# Altium PCB BabyPukeko.PcbDoc
Units mm, origin at the board's own origin, x right, y up, seen from the top; angles counter-clockwise.
Board outline 10 x 12.75 mm, 6 copper layers (Top Layer, GND, SIG, VCC, GND_2, Bottom Layer), stack 1.538 mm thick; 26 components, 27 nets, 165 pads, 56 vias.
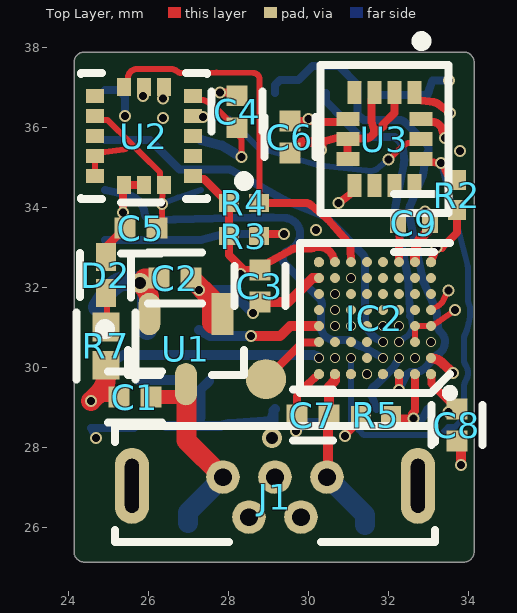
[diagram p0: Top Layer view]
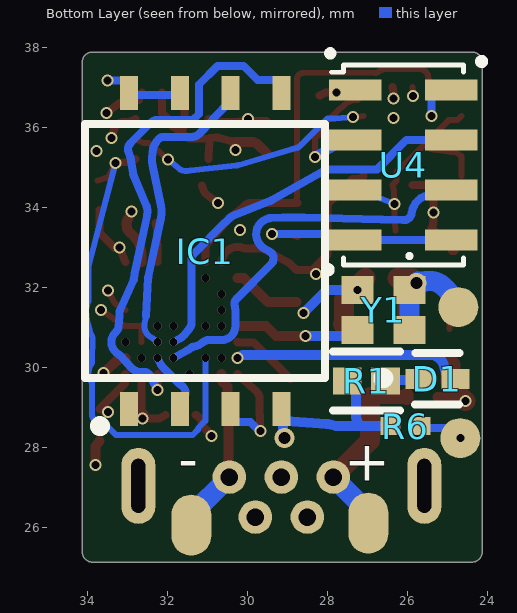
[diagram p1: Bottom Layer view, seen from below]
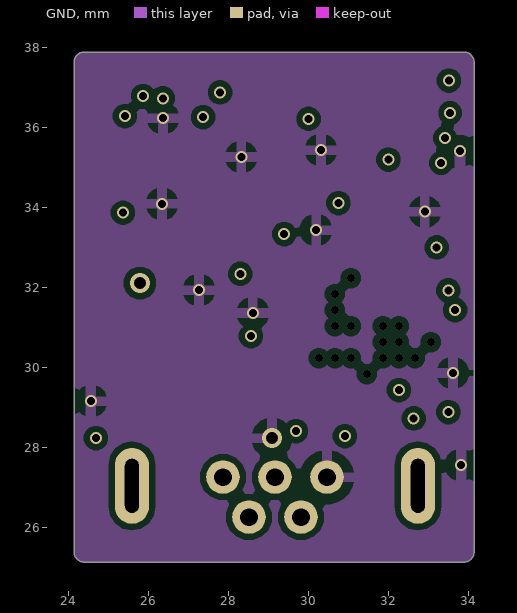
[diagram p2: GND]
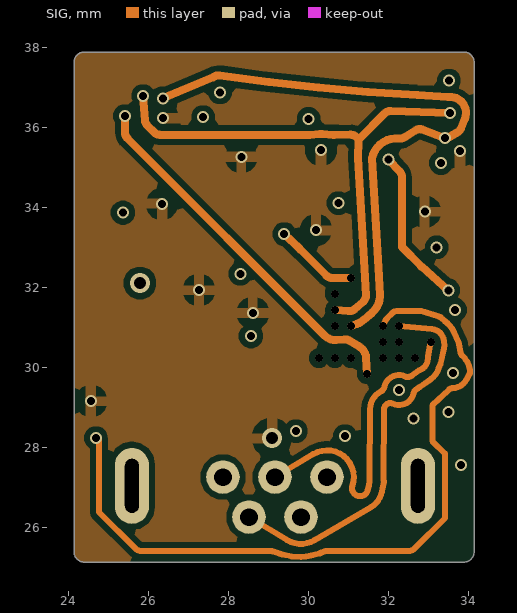
[diagram p3: SIG]
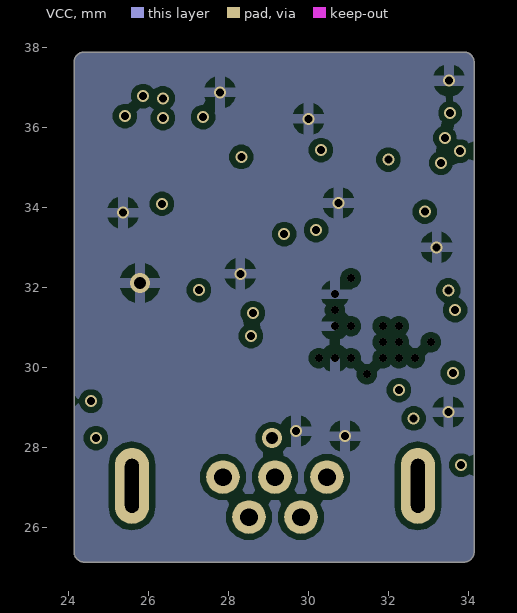
[diagram p4: VCC]
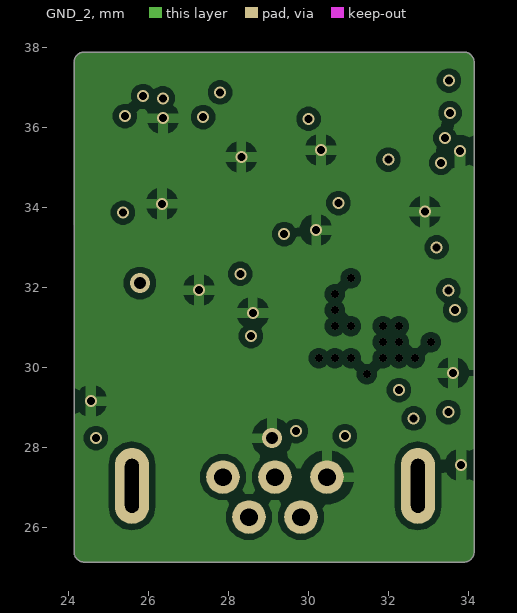
[diagram p5: GND_2]
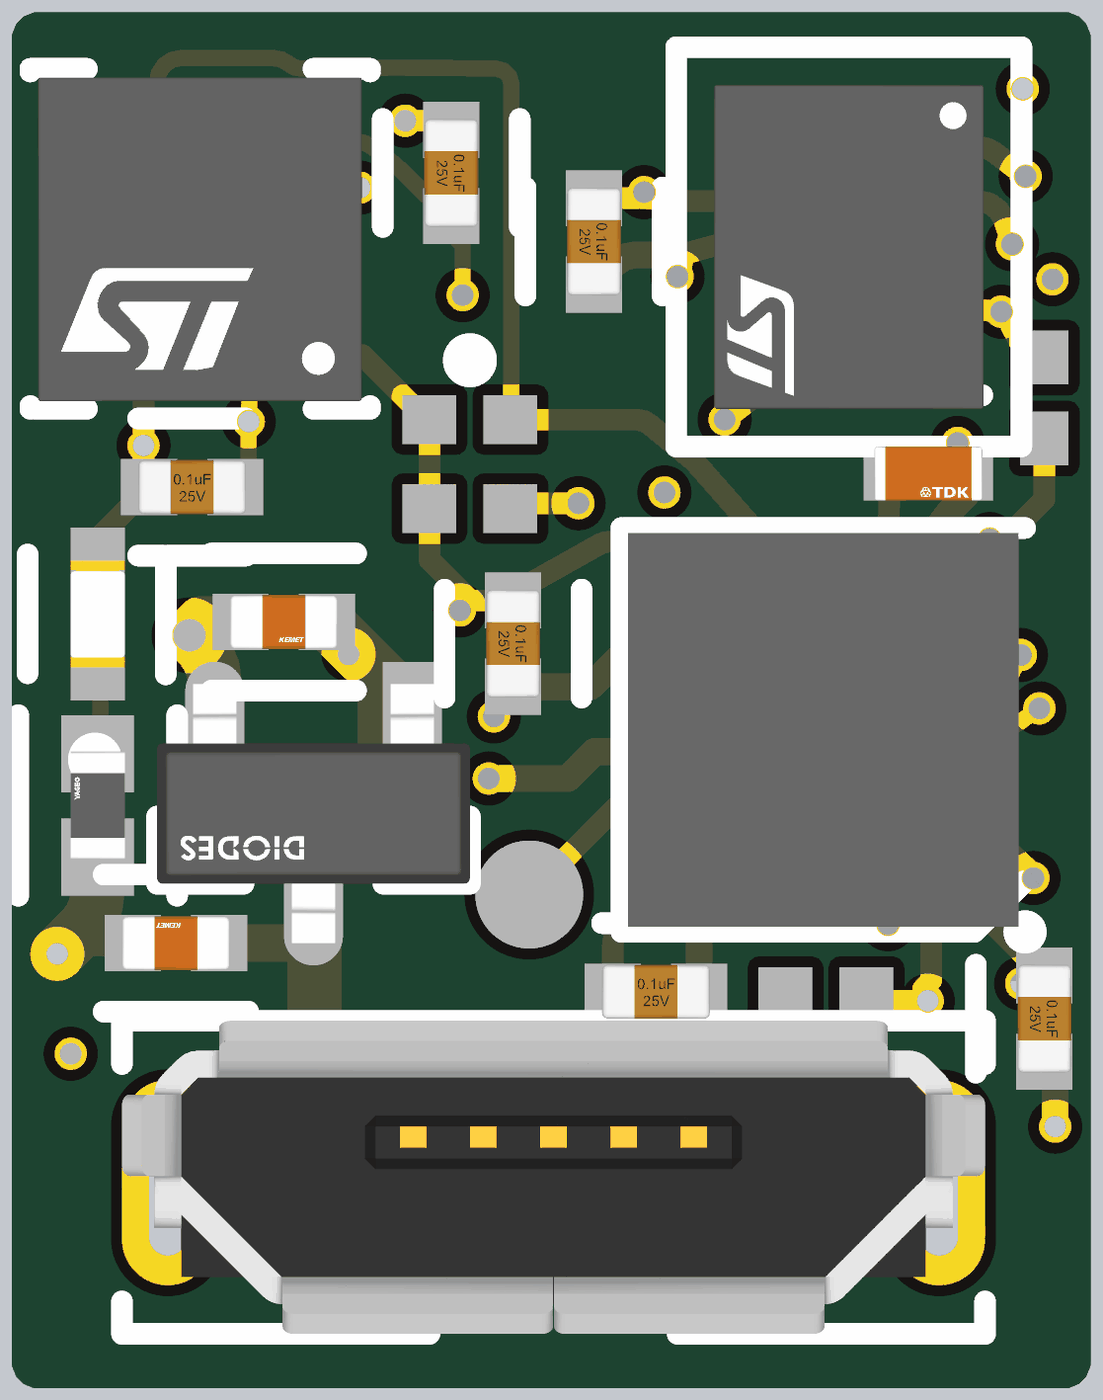
[diagram p6: 3D render of the assembled board from above, using the file's embedded part models]
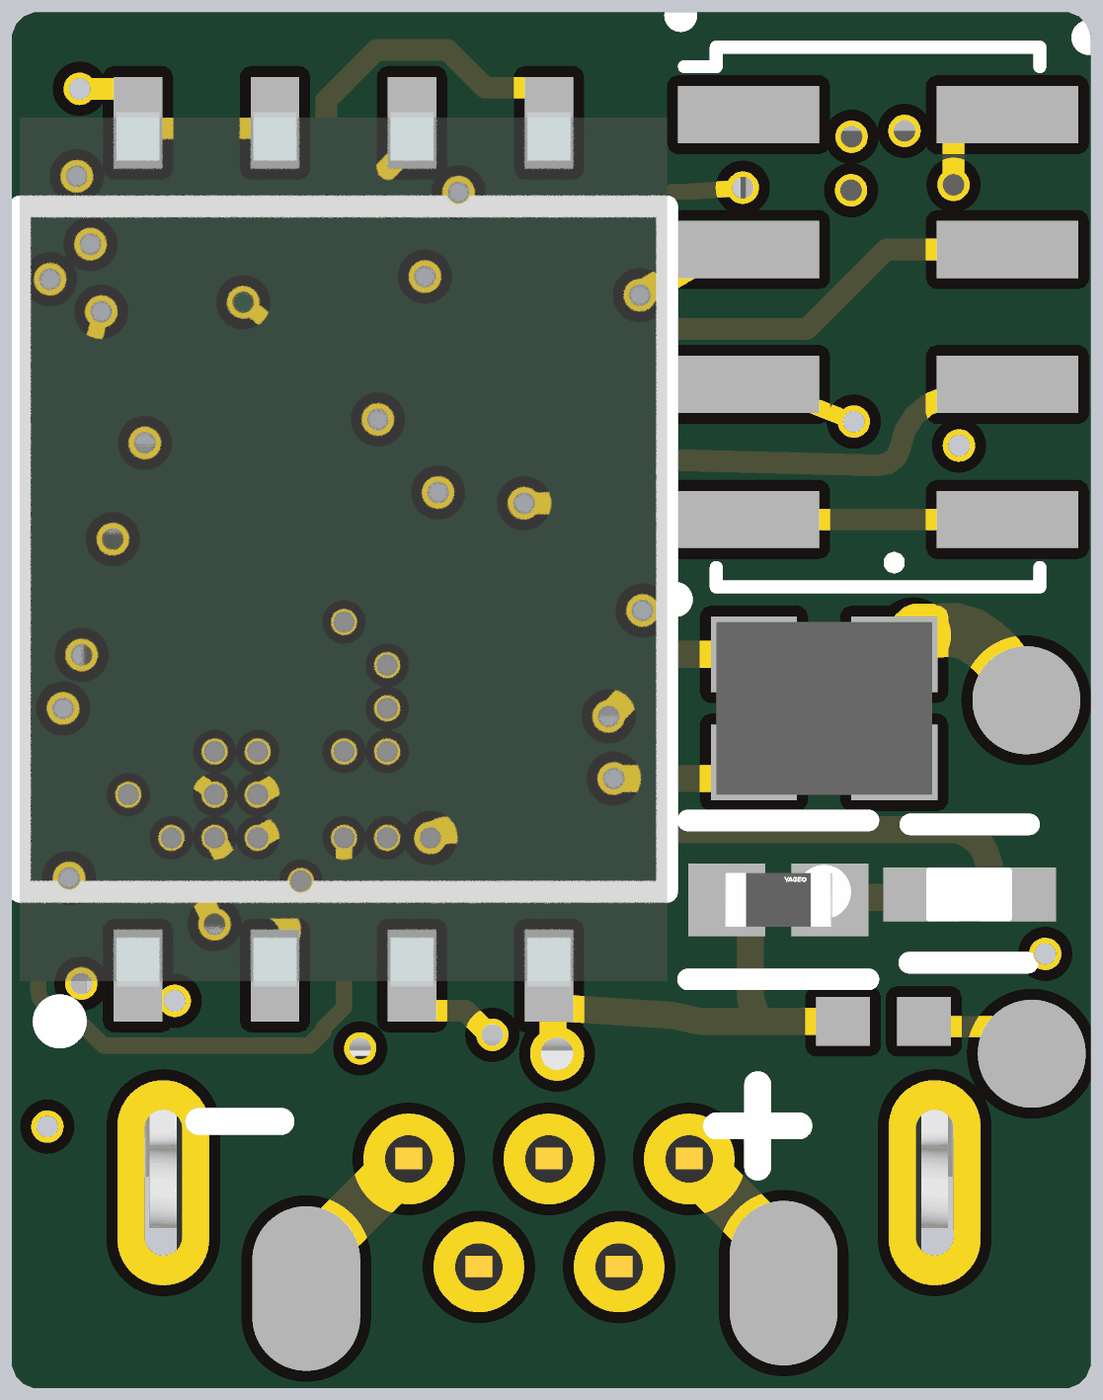
[diagram p7: 3D render of the assembled board from below, using the file's embedded part models]

## Layer stack, top to bottom
Top Solder: solder mask 0.0102, Solder Resist, Dk 3.5
Top Layer: signal copper 0.035
Dielectric 2: prepreg 0.0994, PP-006, Dk 4.1
GND: signal copper 0.0152
Dielectric 4: core 0.55, PP-006, Dk 4.6
SIG: signal copper 0.0152
Dielectric 1: dielectric 0.1088, FR-4, Dk 4.16
VCC: signal copper 0.0152
Dielectric 5: core 0.55, PP-006, Dk 4.6
GND_2: signal copper 0.0152
Dielectric 3: prepreg 0.0994, PP-006, Dk 4.1
Bottom Layer: signal copper 0.035
Bottom Solder: solder mask 0.0102, Solder Resist, Dk 3.5

## Board outline
24.129,25.379 24.129,37.621 cw(c24.383,37.621) 24.383,37.875 33.875,37.875 cw(c33.875,37.621) 34.129,37.621 34.129,25.379 cw(c33.875,25.379) 33.875,25.125 24.383,25.125 cw(c24.383,25.379)

## Design rules (kind name [scope] priority, off if disabled: settings)
Clearance [All] p1: gap=0.15 ignorepadtopadclearanceinfootprint=TRUE
DiffPairsRouting [All] p1: maxlimit=0.254 minlimit=0.15 mostfreqgap=0.254 toplayer_minwidth=0.2 toplayer_maxwidth=0.381 toplayer_prefwidth=0.2 midlayer1_minwidth=0.2 midlayer1_maxwidth=0.381 midlayer1_prefwidth=0.2 midlayer2_minwidth=0.2 midlayer2_maxwidth=0.381 midlayer2_prefwidth=0.2 midlayer3_minwidth=0.2 midlayer3_maxwidth=0.381 midlayer3_prefwidth=0.2 midlayer4_minwidth=0.2 midlayer4_maxwidth=0.381 midlayer4_prefwidth=0.2 bottomlayer_minwidth=0.2 bottomlayer_maxwidth=0.381 bottomlayer_prefwidth=0.2 maxuncoupledlength=12.7
PolygonConnect [All] p1: connectstyle=Relief reliefconductorwidth=0.254 reliefentries=4 polygonreliefangle="90 Angle" airgapwidth=0.254
RoutingVias [All] p1: holewidth=0.3 width=0.2 viastyle="Through Hole" minholewidth=0.2 minwidth=0.2 maxholewidth=0.5 maxwidth=0.7
SolderMaskExpansion [All] p1: expansion=0.102 istentingtop=FALSE
SupplyNets "Schematic Supply Nets_2" [InNet('5v0')] p1: voltage=0.000
SupplyNets "Schematic Supply Nets_1" [InNet('3v3')] p2: voltage=0.000
SupplyNets "Schematic Supply Nets" [InNet('GND')] p3: voltage=0.000
Width [All] p1: maxlimit=0.5 minlimit=0.15 preferedwidth=0.2 midlayer3_maxwidth=0.254 midlayer4_maxwidth=0.254 minimp=50.000000 maximp=50.000000 favimp=50.000000
29 further rules are at their usual default settings.

## Classes and differential pairs
differential pair USB: +USB_P -USB_N

## Components (designator, comment, footprint, x,y, rotation, side; value= is the part's Value field where it differs from the comment)
C1 "C0402C105K8PACTU" FP-C0402C105K8PACTU-MFG 25.65,29.25 r180 top
C2 "C0402C105K8PACTU" FP-C0402C105K8PACTU-MFG 26.65,32.225 r0 top
C3 "0.1uF" FP-C0402-BB-MFG 28.775,32.025 r270 top value="0.10 μF"
C4 "0.1uF" FP-C0402-BB-MFG 28.202,36.385 r270 top value="0.10 μF"
C5 "0.1uF" FP-C0402-BB-MFG 25.8,33.475 r0 top value="0.10 μF"
C6 "0.1uF" FP-C0402-BB-MFG 29.525,35.75 r270 top value="0.10 μF"
C7 "0.1uF" FP-C0402-BB-MFG 30.1,28.8 r0 top value="0.10 μF"
C8 "0.1uF" FP-C0402-BB-MFG 33.7,28.55 r270 top value="0.10 μF"
C9 "4.7uF" FP-C1005-050-0_15-MFG 32.625,33.6 r0 top
D1 "APHHS1005CGCK" FP-APHHS1005CGCK-MFG 25.25,29.7 r180 bottom
D2 "APHHS1005CGCK" FP-APHHS1005CGCK-MFG 24.925,32.3 r90 top
IC1 "MT29F1G01ABAFDWB-IT_F_TR" SON127P800X600X65-8N 31.055,32.9 r90 bottom locked
IC2 "STM32F412REY6TR" BGA64C40P8X8_362X365X58 31.65,31.225 r180 top
J1 "614105150721" 614105150721 29.15,27.03 r0 top locked
R1 "RC0402FR-071KL" FP-RC0402-0_4-IPC_A 27.025,29.65 r180 bottom
R2 "10K" RESC1005X40X25LL05T10 33.7,34.3 r90 top
R3 "10K" RESC1005X40X25LL05T10 28.375,33.275 r0 top
R4 "10K" RESC1005X40X25LL05T10 28.375,34.1 r0 top
R5 "10K" RESC1005X40X25LL05T10 31.675,28.8 r0 top
R6 "10K" RESC1005X40X25LL05T10 26.05,28.525 r180 bottom
R7 "RC0402FR-071KL" FP-RC0402-0_4-IPC_A 24.925,30.525 r90 top
U1 "AP2210N-3.3TRG1" FP-SOT23-IPC_C 26.925,30.45 r270 top
U2 "H3LIS331DLTR" FP-TFLGA16-7983231-MFG 25.875,35.775 r180 top locked
U3 "LSM6DSO32TR" FP-LGA-14L-DM00249496-MFG 31.888,35.7 r270 top
U4 "MS560702BA03-50" MS5607 26.1,35.05 r270 bottom
Y1 "ECS-TXO-2016-33-120-TR" ECSTXO201633120TR 26.6,31.425 r0 bottom

## Footprints (in the part's own frame and the unit in brackets; to place one, negate y for a bottom-side part, rotate by r counter-clockwise, add the part's x,y. Pads: shape width x height; smd on the part's side, far side on the other; paste and mask are expansions set on the pad)
614105150721 [mm] "Micro USB 2.0 Type B Vertical 5 Contacts"
  round 0.84 hole 0.44: 1(-1.3,0.22) 2(-0.65,-0.78) 3(0,0.22) 4(0.65,-0.78) 5(1.3,0.22)
  oval 0.85x1.9 hole 0.35 slot 1.35 at 90 deg: Shell(-3.575,0) Shell(3.575,0)
  silkscreen extent -4,-1.4 4,1.5, body extent -4,-1.4 4,1.5, height 5.64
BGA64C40P8X8_362X365X58 [mm]
  round 0.26 smd: A1(-1.4,1.4) A2(-1,1.4) A3(-0.6,1.4) A4(-0.2,1.4) A5(0.2,1.4) A6(0.6,1.4) A7(1,1.4) A8(1.4,1.4) H1(-1.4,-1.4) H8(1.4,-1.4)
  round 0.25 smd: B1(-1.4,1) B2(-1,1) B3(-0.6,1) B4(-0.2,1) B5(0.2,1) B6(0.6,1) B7(1,1) B8(1.4,1) C1(-1.4,0.6) C2(-1,0.6) C3(-0.6,0.6) C4(-0.2,0.6) C5(0.2,0.6) C6(0.6,0.6) C7(1,0.6) C8(1.4,0.6) D1(-1.4,0.2) D2(-1,0.2) D3(-0.6,0.2) D4(-0.2,0.2) D5(0.2,0.2) D6(0.6,0.2) D7(1,0.2) D8(1.4,0.2) E1(-1.4,-0.2) E2(-1,-0.2) E3(-0.6,-0.2) E4(-0.2,-0.2) E5(0.2,-0.2) E6(0.6,-0.2) E7(1,-0.2) E8(1.4,-0.2) F1(-1.4,-0.6) F2(-1,-0.6) F3(-0.6,-0.6) F4(-0.2,-0.6) F5(0.2,-0.6) F6(0.6,-0.6) F7(1,-0.6) F8(1.4,-0.6) G1(-1.4,-1) G2(-1,-1) G3(-0.6,-1) G4(-0.2,-1) G5(0.2,-1) G6(0.6,-1) G7(1,-1) G8(1.4,-1) H2(-1,-1.4) H3(-0.6,-1.4) H4(-0.2,-1.4) H5(0.2,-1.4) H6(0.6,-1.4) H7(1,-1.4)
  silkscreen extent -1.97,-1.87 1.87,1.97, body extent -1.81,-1.83 1.81,1.83, height 0.59
ECSTXO201633120TR [mm]
  rect 0.8x0.7 smd: 1(-0.65,-0.5) 2(0.65,-0.5) 3(0.65,0.5) 4(-0.65,0.5)
  silkscreen extent -0.7,-1.4 -0.6,-1.3, body extent -1,-0.8 1,0.8, height 0.9
FP-APHHS1005CGCK-MFG [mm]
  rect 0.7x0.5 smd paste+0 mask+0: 1(-0.45,0) 2(0.45,0)
  silkscreen extent -1.48,-0.63 0.55,0.65, body extent -0.5,-0.25 0.5,0.25, height 0.5
FP-C0402-BB-MFG [mm]
  rect 0.52x0.52 smd paste+0 mask+0: 1(-0.4,0) 2(0.4,0)
  silkscreen extent -0.5,-0.64 0.5,0.64, body extent -0.8,-0.4 0.8,0.4, height 0.25
FP-C0402C105K8PACTU-MFG [mm]
  rect 0.52x0.52 smd paste+0 mask+0: 1(-0.4,0) 2(0.4,0)
  silkscreen extent -0.67,-0.64 0.67,0.64, body extent -0.8,-0.4 0.8,0.4, height 0.25
FP-C1005-050-0_15-MFG [mm]
  rect 0.4x0.5 smd paste+0 mask+0: 1(-0.4,0) 2(0.4,0)
  silkscreen extent -0.5,-0.72 0.5,0.72, body extent -0.7,-0.43 0.7,0.43, height 0.25
FP-LGA-14L-DM00249496-MFG [mm]
  rect 0.575x0.35 smd paste-1000 mask+0: 1(-1.162,0.75) 2(-1.162,0.25) 3(-1.162,-0.25) 4(-1.162,-0.75) 8(1.162,-0.75) 9(1.162,-0.25) 10(1.162,0.25) 11(1.162,0.75)
  rect 0.35x0.575 smd paste-1000 mask+0: 5(-0.5,-0.913) 6(0,-0.913) 7(0.5,-0.913) 12(0.5,0.913) 13(0,0.913) 14(-0.5,0.913)
  silkscreen extent -2.57,-1.6 1.85,1.6, body extent -2.05,-1.8 2.05,1.8, height 0.25
FP-RC0402-0_4-IPC_A [mm]
  rect 0.715x0.672 smd paste+0 mask+0: 1(-0.479,0) 2(0.479,0)
  silkscreen extent -0.84,-0.74 0.84,0.74, body extent -0.5,-0.25 0.5,0.25, height 0.4
FP-SOT23-IPC_C [mm]
  rect 1.059x0.547 smd paste+0 mask+0: 1(-0.877,0.915)
  rrect100% 1.059x0.547 smd paste+0 mask+0: 2(-0.877,-0.915) 3(0.877,0)
  silkscreen extent 0.03,-1.45 0.65,1.45, body extent -1.51,-1.55 1.51,1.55, height 0.25
FP-TFLGA16-7983231-MFG [mm]
  rect 0.45x0.35 smd paste+0 mask+0: 1(-1.225,1) 2(-1.225,0.5) 3(-1.225,0) 4(-1.225,-0.5) 5(-1.225,-1) 9(1.225,-1) 10(1.225,-0.5) 11(1.225,0) 12(1.225,0.5) 13(1.225,1)
  rect 0.35x0.45 smd paste+0 mask+0: 6(-0.5,-1.225) 7(0,-1.225) 8(0.5,-1.225) 14(0.5,1.225) 15(0,1.225) 16(-0.5,1.225)
  silkscreen extent -2.63,-1.58 1.58,1.58, body extent -2.07,-2.07 2.07,2.07, height 0.25
MS5607 [mm] "Small Outline No-Lead (SON), 1.25 mm pitch; 8 pin, 5.00 mm L X 3.00 mm W X 0.95 mm H body"
  rect 0.53x1.31 smd: 1(-1.875,-1.2) 2(-0.625,-1.2) 3(0.625,-1.2) 4(1.875,-1.2) 5(1.875,1.2) 6(0.625,1.2) 7(-0.625,1.2) 8(-1.875,1.2)
  silkscreen extent -2.82,-1.92 2.65,1.99, body extent -2.54,-1.52 2.54,1.52, height 0.95
RESC1005X40X25LL05T10 [mm] "Chip Resistor, 2-Leads, Body 1.00x0.50mm, IPC High Density"
  rect 0.5x0.45 smd: 1(-0.375,0) 2(0.375,0)
  body extent -0.53,-0.27 0.53,0.28, height 0.4
SON127P800X600X65-8N [mm]
  rect 0.85x0.45 smd: 1(-3.95,1.905) 2(-3.95,0.635) 3(-3.95,-0.635) 4(-3.95,-1.905) 5(3.95,-1.905) 6(3.95,-0.635) 7(3.95,0.635) 8(3.95,1.905)
  silkscreen extent -4.5,-3 3.18,3, body extent -4.05,-3 4.05,3, height 0.65

## Part data
C1 C2: library part CMP-2008-02081-2, "CAP CER 1UF 10V X5R 0402", Capacitance=1uF, Case Code (Imperial)=0402, Case Code (Metric)=1005, Dielectric=X5R, Dielectric Material=Ceramic, Max Operating Temperature=85°C, Min Operating Temperature=-55°C, Package Quantity=1, Tolerance=10%, Voltage=10V, Case/Package=0402, Construction=Flat, Contact Plating=Tin, Depth=0.5mm, Dissipation Factor=5%, Height=0.5mm, Lead Free="Lead Free", Length=1mm, Mount="Surface Mount", Number of Pins=2, Packaging="Tape and Reel", Radiation Hardening=No, REACH SVHC="No SVHC", RoHS Compliant=Yes, Series=C, Termination=SMD/SMT, Thickness=0.022inch, Voltage Rating=10V, Voltage Rating (DC)=10V, Width=0.5mm
C3 C4 C5 C6 C7 C8: library part CMP-2008-02046-2, "CAP CER 0.1UF 10V X5R 0402", Capacitance="0.10 μF", Manufacturer=Kemet, Manufacturer Part Number=C0402C104K8PACTU, Package=C0402-BB, Temperature="-55°C to +125°C", Temperature Characteristic=X5R, Temperature Coefficient=15%, Temperature Range High=+125°C, Temperature Range Low=-55°C, Tolerance=0.1, Voltage Rating="10 V", Automotive=No, Category=Cap, ComponentLink2Description=Datasheet, ComponentLink2URL=https://content.kemet.com/datasheets/KEM_C1002_X7R_SMD.pdf, Device Class L1="Passive Components", Device Class L2=Capacitors, Device Class L3="Ceramic Capacitors", Digikey Description="CAP CER 0.1UF 10V X5R 0402", Height=0.55mm, Ipc Land Pattern Name=CAPC10050X50, Lead Free=Yes, Material=Ceramic, Mouser Description="Capacitor 100 nF 10 VDC 0402", Octopart=https://octopart.com/c0402c104k8pactu-kemet-140039, RoHS=TRUE
C9: library part CMP-2000-05997-2, "CAP CER 4.7UF 10V X5R 0402", Case Code (Imperial)=0402, Case Code (Metric)=1005, Dielectric=X5R, Dielectric Material=Ceramic, Max Operating Temperature=85°C, Min Operating Temperature=-55°C, Package Quantity=10000, Tolerance=10%, Voltage Rating=10V, Capacitance=4.7uF, Case/Package=0402, Lead Free="Lead Free", Length=0.039inch, Mount="Surface Mount", Packaging="Cut Tape", REACH SVHC="No SVHC", RoHS Compliant=Yes, Series=C, Thickness=0.022inch, Voltage Rating (DC)=10V, Width=0.02inch
D1 D2: library part CMP-44529-000044-1, "LED GREEN CLEAR CHIP SMD", Case Code (Imperial)=0402, Case Code (Metric)=1005, Color=Green, Forward Current=20mA, Forward Voltage=2.1V, Lens Color=Clear, Max Operating Temperature=85°C, Min Operating Temperature=-40°C, Package Quantity=2000, Case/Package=0402, Dominant Wavelength=570nm, Height=0.6mm, Illumination Color=Green, Lead Free="Lead Free", Length=1mm, Lens Style=Clear, Luminous Intensity=50mcd, Mount="Surface Mount", Number of LEDs=1, Number of Pins=2, Packaging="Tape and Reel", Test Current=20mA, Viewing Angle=120°, Wavelength=570nm, Width=0.5mm
IC1: "Integrated Circuit", Arrow Part Number="MT29F1G01ABAFDWB-IT:F TR", Manufacturer_Name=Micron, Mouser Part Number=340-319941-REEL, Arrow Price/Stock=https://www.arrow.com/en/products/mt29f1g01abafdwb-itf-tr/micron-technology, Datasheet Link=https://static6.arrow.com/aropdfconversion/e214d87b5f763ef07ebe46ce1e43d78d0de80c6/m78a_1gb_3v_nand_spi.pdf, Height=0.65mm, Manufacturer_Part_Number="MT29F1G01ABAFDWB-IT:F TR", Mouser Price/Stock=https://www.mouser.co.uk/ProductDetail/Micron/MT29F1G01ABAFDWB-ITF-TR?qs=j%252B1pi9TdxUZK8%252B7736rAcg%3D%3D
IC2: "Integrated Circuit", Manufacturer_Name=STMicroelectronics, Mouser Part Number=511-STM32F412REY6TR, Arrow Part Number=STM32F412REY6TR, Arrow Price/Stock=https://www.arrow.com/en/products/stm32f412rey6tr/stmicroelectronics?region=nac, Datasheet Link=http://www.st.com/content/ccc/resource/technical/document/datasheet/15/90/07/b3/8c/10/4e/95/DM00213872.pdf/files/DM00213872.pdf/jcr:content/translations/en.DM00213872.pdf, Height=0.585mm, Manufacturer_Part_Number=STM32F412REY6TR, Mouser Price/Stock=https://www.mouser.co.uk/ProductDetail/STMicroelectronics/STM32F412REY6TR?qs=qzCNEk%252BRr%252BY9qzpOClZyHQ%3D%3D
J1: library part CMP-1502-03250-2, Contact Resistance=30mΩ, Current Rating=1.8A, Insulation Resistance=1GΩ, Max Operating Temperature=85°C, Min Operating Temperature=-40°C, Operating Supply Voltage=30V, Connector Type=USB, Contact Material=Gold, Contact Plating=Gold, Features=Shielded, Gender=Receptacle, Height=5.81mm, Lead Free="Lead Free", Mount="Through Hole, Vertical", NexarPartId=52645111, Number of Contacts=5, Number of Pins=5, Orientation=Vertical, Packaging="Tape and Reel", REACH SVHC=Unknown, RoHS=Compliant, USB Standard="USB 2.0", Voltage Rating=30V
R1 R7: library part CMP-2002-07472-3, "RES 1K OHM 1% 1/16W 0402", Case Code (Imperial)=0402, Case Code (Metric)=1005, Max Operating Temperature=155°C, Max Power Dissipation=63mW, Min Operating Temperature=-55°C, Power Rating=62.5mW, Resistance=1kR, Resistance Tolerance=1%, Resistor Type="Thick Film", Temperature Coefficient=100ppm/°C, Voltage Rating=50V, Case/Package=0402, Construction=Rectangular, Depth=0.5mm, Features="Moisture Resistant", Height=0.32mm, Lead Free="Lead Free", Length=1mm, Military Standard=Not, Number of Pins=2, Number of Terminations=2, Packaging="Tape and Reel", Reach SVHC Compliant=Yes, RoHS Compliant=Yes, Series=RC, Size Code=0402, Technology="THICK FILM", Termination=SMD/SMT, Tolerance=1%, Voltage Rating (DC)=50V, Width=0.5mm
R2 R3 R4 R5 R6: library part CMP-2002-07353-1, Manufacturer="Yageo / Phycomp", Part Number=RC0402FR-0710KL
U1: library part CMP-12756-000036-1, "IC REG LINEAR 3.3V 300MA SOT23-3", Case/Package=SOT-23-3, Dropout Voltage=250mV, Max Input Voltage=13.2V, Max Operating Temperature=125°C, Max Output Current=300mA, Min Input Voltage=2.5V, Min Operating Temperature=-40°C, Output Voltage=3.3V, Package Quantity=3000, Power Supply Rejection Ratio (PSRR)=75dB, Quiescent Current=150uA, Accuracy=1%, Height=1.3mm, Length=3.02mm, Mount="Surface Mount", Number of Outputs=1, Number of Pins=3, Number of Regulators=1, Output Current=300mA, Output Type=Fixed, Packaging="Tape and Reel", Polarity=Positive, Weight=0.000282oz, Width=1.7mm
U2: library part CMP-12175-000002-1, "ACCEL 100-400G I2C/SPI 16TFLGA", Manufacturer=STMicroelectronics, Max Supply Voltage=3.6V, Min Supply Voltage=2.16V, Operating Supply Current=10-300uA, Package=TFLGA16-7983231, Temperature="-40°C to +85°C", Temperature Range High=+85°C, Temperature Range Low=-40°C, Accel Axis="X+Y and Z", Accel Range=100/200/400g, Accel Resolution=16bits, Automotive=No, Category=IC, ComponentLink2Description=Datasheet, ComponentLink2URL=https://www.st.com/resource/en/datasheet/h3lis331dl.pdf, Device Class L1=Sensors, Device Class L2="Motion Sensors", Device Class L3=Accelerometers, Digikey Description="ACCEL 100-400G I2C/SPI 16TFLGA", Footprint Url=https://www.st.com/content/ccc/resource/technical/document/technical_note/73/17/9c/16/dd/96/4a/01/CD00134799.pdf/files/CD00134799.pdf/jcr:content/translations/en.CD00134799.pdf, Height=1mm, Lead Free=Yes, Manufacturer Part Number=H3LIS331DLTR, Mouser Description="Accelerometer Triple +/-100g/+/-200g/+/-400g 2.5V 16-Pin TFLGA T/R", Octopart=https://octopart.com/h3lis331dltr-stmicroelectronics-29186499, RoHS=TRUE, Sensor Output=I2C,SPI
U3: library part CMP-12177-000015-1, "INEMO INERTIAL MODULE: 3D ACCELE"
U4: library part CMP-040-000016-3, "Barometric Pressure Sensor I2C/SPI", Supplier Part Number 1=223-1198-1-ND, Design Item ID=MS560702BA03-50, Reviewed By="Adam Rising", Source=Sensors.SchLib, Supplier 1=Digi-Key
Y1: "Crystal or Oscillator", Manufacturer_Name=ECS, Mouser Part Number=520-TXO-2016-33-120T, Arrow Part Number=ECS-TXO-2016-33-120-TR, Arrow Price/Stock=https://www.arrow.com/en/products/ecs-txo-2016-33-120-tr/ecs-international?region=nac, Datasheet Link=https://ecsxtal.com/store/pdf/ECS-TXO-2016.pdf, Height=0.8mm, Manufacturer_Part_Number=ECS-TXO-2016-33-120-TR, Mouser Price/Stock=https://www.mouser.co.uk/ProductDetail/ECS/ECS-TXO-2016-33-120-TR?qs=PzGy0jfpSMsr8Aj1SRFQrg%3D%3D

## Free pads (board coordinates)
  round 1 smd far side: 2(24.675,28.225) 2(24.725,31.5)
  oval 1x1.524 smd far side: 3(26.975,26.1) 4(31.4,26.05)
  round 1 smd: 5(28.925,29.7)

## Via types
v1: diameter 0.3, hole 0.2, Top Layer to Bottom Layer, 37 vias
v2: diameter 0.2, hole 0.2, Top Layer to Bottom Layer, 16 vias
v3: diameter 0.5, hole 0.3, Top Layer to Bottom Layer, 2 vias
v4: diameter 0.2/0.2/0.2/0.2/0.2/0.3 (per signal layer), hole 0.2, Top Layer to Bottom Layer, 1 vias

## Nets (pads, with @x,y where several pads share a name; then routed paths per layer and width w, separated by ;. In a path a pad name is that pad's centre, name@x,y a point inside that pad or via, vN(x,y) a via of type N, cw(c..) or ccw(c..) an arc to the next point about the centre after c; other vN are vias at no path point)
3v3: C2.1 C3.1 C4.1 C5.1 C6.1 C7.1 C8.1 D2.2 IC1.3 IC1.7 IC1.8 IC2.A1 IC2.A8 IC2.B7 IC2.D7 IC2.F7 IC2.H1 IC2.H7 pad.2@24.725,31.5 R2.1 R3.1 R4.1 R5.1 U1.2 U2.1 U2.14 U2.15 U3.5 U3.8 U4.1 Y1.1 Y1.4 | length 23.3
  Top Layer w0.2: D2.2@24.883,32.9 24.825,32.9 C5.1@25.388,33.463 ; U2.14 25.35,34.425 v1(25.35,33.86) 25.35,33.635 25.385,33.472 C5.1@25.388,33.463 ; U2.14@25.388,34.55 U2.15 ; C5.1 C5.1@25.388,33.463 ; U2.1 27.175,34.7 27.375,34.7 27.975,34.1 R4.1 R3.1 28,32.8 v1@28.375,32.425 ; v1(27.776,36.869) 28.042,36.869 C4.1 ; v1(28.282,32.332) v1@28.375,32.425 ; C6.1 C6.1@29.685,36.152 ; v1(29.675,28.4) 29.687,28.412 29.687,28.787 C7.1 29.7,29.229 cw(c29.9,29.228) 29.711,29.295 cw(c30.282,29.091) 29.72,29.318 cw(c29.905,29.243) 29.771,29.391 29.951,29.554 IC2.A8 ; C6.1@29.686,36.152 29.987,36.152 cw(c29.987,35.952) 29.997,36.151 v1(29.989,36.207) ; v1@30.025,36.148 30.401,36.126 ccw(c30.425,36.525) 30.425,36.125 30.687,36.125 30.788,36.125 U3.5 ; IC2.H7@30.65,32.625 30.611,32.744 ccw(c30.25,32.625) 30.118,32.981 cw(c30.049,33.169) 30.051,32.969 29.671,32.969 ccw(c29.671,32.769) 29.573,32.943 28.935,32.585 C3.1 v1@28.375,32.425 ; v1(30.736,34.1) 31.062,34.35 U3.8 ; v1(30.9,28.274) 30.9,28.302 31.15,28.552 31.15,28.675 31.275,28.8 R5.1 ; IC2.A1 33.058,29.817 33.058,29.592 C8.1 33.54,28.875 v1(33.485,28.875) ; IC2.H1 v1(33.193,32.993) ; v1@33.321,32.982 33.7,33.36 R2.1
  Top Layer w0.5: U1.2 26.01,31.66 ccw(c25.51,31.66) 25.864,32.013 v3(25.775,32.102) 25.889,32.215 26.24,32.215 C2.1
  Bottom Layer w0.2: v1(29.675,28.4) 29.702,28.4 29.927,28.625 30.295,28.625 30.42,28.75 IC1.3 IC1.3@30.42,29 ; IC1.7@31.69,36.8 32.96,36.8 32.975,36.845 33.085,37.165 v1(33.499,37.165)
  Bottom Layer w0.5: pad.2@24.725,31.5 24.947,31.85 cw(c25.368,31.581) 25.031,31.95 25.113,32.025 cw(c25.45,31.655) v3@25.545,32.146 ; v3@25.55,32.145 25.73,32.145 Y1.1@25.8,32.075 ; v3(25.775,32.102) Y1.1@25.8,32.075 ; Y1.1@25.818,32.055 25.828,32.044 cw(c25.461,31.705) 25.845,32.025 Y1.1 Y1.4 ; Y1.1@25.818,32.055 Y1.1@25.8,32.075
  other v2: 30.65,30.225 30.65,31.025 30.65,31.825
5v0: C1.1 J1.1 pad.3 U1.3 | length 4.9
  Top Layer w0.35: C1.1@26.025,29.225 C1.1@26.025,29.25 ; C1.1@26.025,29.3 C1.1@26.025,29.25 ; U1.3@26.925,29.25 C1.1 C1.1@26.025,29.25 ; J1.1@27.848,27.252 cw(c27.861,26.927) J1.1@27.85,27.252
  Top Layer w0.5: U1.3@26.925,29.25 26.934,29.241 26.934,28.166 27.848,27.252 J1.1
  Bottom Layer w0.5: pad.3 26.975,26.369 27.85,27.244 J1.1
ACC_MISO: IC2.E7 U2.7 U3.1 | length 14.9
  Top Layer w0.15: v1(25.855,36.775) 25.855,36.85 U2.7
  Top Layer w0.2: U3.1 32.713,36.675 33.119,36.623 cw(c33.088,36.375) 33.239,36.574 v1(33.527,36.354)
  SIG w0.2: v1(25.855,36.775) 25.9,36.168 ; 25.9,36.167 ccw(c26.1,36.183) 25.958,36.043 26.135,35.865 26.136,35.864 ccw(c26.276,36.007) 26.276,35.807 29.989,35.807 ccw(c29.989,36.207) 30.014,35.808 30.275,35.824 cw(c30.3,35.425) 30.324,35.824 30.612,35.807 ccw(c30.624,36.007) 30.623,35.807 ; 30.624,35.807 ccw(c30.624,36.007) 30.625,35.807 31.041,35.81 cw(c31.042,35.61) 31.185,35.75 cw(c31.044,35.608) 31.187,35.748 31.242,35.692 ; v2(30.65,31.425) 30.993,31.397 ccw(c31.008,31.597) 31.138,31.444 31.351,31.626 ccw(c31.221,31.778) 31.421,31.787 31.4,32.243 ccw(c31.05,32.225) 31.399,32.245 31.226,35.232 cw(c31.975,35.275) 31.226,35.32 31.242,35.581 ccw(c31.042,35.593) 31.242,35.6 ; 31.242,35.601 cw(c31.442,35.61) 31.242,35.61 31.242,35.692 ; v1(33.527,36.354) 32.038,36.4 ccw(c32.032,36.2) 31.891,36.341 31.242,35.692
ACC_MOSI: IC2.D6 U2.6 U3.14 | length 16.7
  Top Layer w0.2: v1(26.345,36.72) 26.345,36.875 U2.6 ; U3.14 32.988,36.125 33.088,36.125 cw(c33.088,35.875) 33.325,35.953 v1(33.4,35.725)
  SIG w0.2: v1(26.345,36.72) 27.601,37.243 ccw(c27.524,37.428) 27.632,37.26 cw(c27.741,37.092) 27.769,37.29 ccw(c36.012,94.934) 32.71,36.797 33.472,36.753 ; v2(31.05,31.025) 31.201,31.081 ccw(c31.008,31.597) 31.366,31.178 31.578,31.36 ccw(c31.221,31.778) 31.771,31.764 ccw(c31.221,31.778) 31.77,31.803 31.749,32.26 ccw(c31.4,32.243) 31.749,32.266 31.578,35.217 cw(c32.182,35.103) 32.251,35.714 ; 32.252,35.714 ccw(c32.274,35.912) 32.379,35.742 32.668,35.92 cw(c32.773,35.75) 32.844,35.937 v1(33.4,35.725) 33.456,35.736 ccw(c33.418,35.932) 33.517,35.758 33.715,35.871 ccw(c33.616,36.044) 33.801,35.968 33.897,36.202 ccw(c33.527,36.354) 33.82,36.626 33.813,36.634 ccw(c33.666,36.498) 33.799,36.648 ccw(c33.533,36.349) 33.792,36.654 33.791,36.655 ccw(c33.527,36.354) 33.497,36.753 cw(c33.484,36.953) 33.473,36.753
ACC_SCLK: IC2.E1 U2.4 U3.13 | length 10.9
  Top Layer w0.15: U2.4 27.25,36.249 v1(27.354,36.249) ; v1(31.984,35.187) 32.358,35.539 cw(c32.513,35.375) 32.511,35.6 32.587,35.6 U3.13 ; IC2.E1 33.224,31.526 ccw(c33.05,31.825) 33.36,31.672 v1(33.482,31.919)
  SIG w0.2: v1(31.984,35.187) 32.27,34.888 cw(c32.125,34.75) 32.325,34.75 32.325,33 32.806,32.519 ccw(c32.947,32.66) 32.815,32.511 v1(33.482,31.919)
  Bottom Layer w0.15: v1(27.354,36.249) 27.804,36.215 ; 27.805,36.215 27.854,36.212 ccw(c27.864,36.361) 27.864,36.211 28.002,36.211 28.69,35.524 ; 28.69,35.523 ccw(c28.795,35.63) 28.769,35.482 ; 28.771,35.482 cw(c28.742,35.335) 28.785,35.478 30.217,35.048 ccw(c30.325,35.407) 30.287,35.034 31.423,34.918 cw(c31.408,34.769) 31.439,34.916 ccw(c31.53,35.352) 31.619,34.915 ccw(c31.59,35.062) 31.684,34.945 v1(31.984,35.187)
BOOT: IC2.D4 pad.2@24.675,28.225 R6.2 | length 20.2
  SIG w0.15: v1@24.75,28.225 24.75,26.375 25.667,25.459 ccw(c25.808,25.6) 25.808,25.4 28.034,25.4 29.057,25.4 cw(c29.055,25.25) 29.111,25.389 ; 29.112,25.389 ccw(c29.8,27.089) 29.8,25.255 ccw(c29.8,26.25) 30.055,25.288 30.271,25.345 ccw(c29.8,26.25) 30.281,25.351 cw(c30.374,25.174) 30.311,25.363 30.421,25.4 32.492,25.4 ccw(c32.492,25.6) 32.633,25.459 33.4,26.225 33.4,27.835 33.085,28.15 33.085,29.041 33.501,29.436 cw(c33.604,29.328) 33.602,29.478 ccw(c33.599,29.853) 33.928,29.674 34.008,29.821 cw(c34.14,29.75) 34.01,29.825 ; v2(31.85,31.025) 31.919,31.172 cw(c32.1,31.087) 31.958,31.228 32.077,31.347 cw(c32.218,31.206) 32.218,31.406 32.755,31.407 cw(c32.756,31.207) 32.816,31.398 32.893,31.374 33.246,31.266 33.248,31.265 ; 33.248,31.265 cw(c33.203,31.122) 33.302,31.234 33.406,31.143 ccw(c33.654,31.424) 33.411,31.139 33.455,31.101 cw(c33.05,30.625) 33.462,31.095 cw(c33.05,30.625) 33.62,30.881 33.742,30.609 cw(c33.605,30.548) 33.753,30.575 33.753,30.573 33.787,30.371 ccw(c33.925,30.395) 33.83,30.291 cw(c33.403,29.822) 34.029,29.928 cw(c33.881,29.902) 34.011,29.826
  Bottom Layer w0.2: v1(24.675,28.225) 24.55,28.475 25.625,28.475 R6.2
FLASH_MISO: IC1.2 IC2.B3 | length 1.6
  Bottom Layer w0.2: IC1.2 31.569,29.275 31.562,29.295 cw(c31.75,29.364) 31.64,29.531 ccw(c31.45,29.825) 31.698,29.578 32.097,29.978 ccw(c31.85,30.225) 32.157,30.056 v2(32.25,30.225)
FLASH_MOSI: IC1.5 IC2.A3 | length 12.8
  Top Layer w0.2: v1(32.25,29.425) IC2.A3
  Bottom Layer w0.2: IC1.5 29.15,37.05 29.275,37.175 29.741,37.175 30.091,37.525 30.749,37.525 31.215,37.059 31.215,36.321 31.361,36.175 32.019,36.175 32.022,36.179 32.259,36.179 cw(c32.259,35.979) 32.401,36.12 32.927,35.594 32.928,35.593 cw(c32.785,35.453) 32.964,35.543 cw(c32.785,35.453) 32.975,35.39 32.92,35.226 ccw(c33.3,35.1) 32.904,35.159 32.862,34.875 cw(c32.664,34.904) 32.859,34.861 ccw(c33.25,34.775) 32.854,34.831 ; v1(32.25,29.425) 32.413,29.765 cw(c32.593,29.678) 32.613,29.877 ccw(c32.65,30.225) 32.909,29.99 33.173,30.281 cw(c33.321,30.146) 33.223,30.321 ccw(c33.05,30.625) 33.287,30.883 cw(c33.422,31.03) 33.223,31.013 33.201,31.266 cw(c33.6,31.3) 33.201,31.323 ccw(c33.001,31.336) 33.184,31.417 32.847,32.172 cw(c33.03,32.253) 32.83,32.243 ccw(c32.281,32.212) 32.819,32.327 32.504,33.802 cw(c32.896,33.884) 32.527,34.039 32.84,34.782 ccw(c32.656,34.86) 32.854,34.83
FLASH_NCS: IC1.1 IC2.A2 R5.2 | length 2.1
  Top Layer w0.2: R5.2 32.2,28.715 v1(32.619,28.715) ; v1@32.575,28.8 32.575,28.827 32.65,28.902 IC2.A2
  Bottom Layer w0.2: v1(32.619,28.715) 32.835,28.715 IC1.1
FLASH_SCLK: IC1.6 IC2.C3 | length 7.7
  Bottom Layer w0.15: v2@32.262,30.625 ccw(c32.158,30.733) 32.263,30.626 32.333,30.696 cw(c32.438,30.589) 32.378,30.726 ccw(c32.25,31.025) 32.568,31.092 32.535,31.249 cw(c32.682,31.28) 32.532,31.28
  Bottom Layer w0.2: IC1.6 30.42,36.65 30.865,36.205 30.865,36.176 31.225,35.816 ccw(c31.367,35.958) 31.367,35.758 32.077,35.758 cw(c32.077,35.558) 32.218,35.7 cw(c31.827,35.311) 32.345,35.501 cw(c32.157,35.432) 32.356,35.455 32.382,35.233 cw(c31.984,35.187) 32.38,35.128 32.37,35.059 cw(c32.172,35.088) 32.368,35.049 32.161,34.033 ccw(c32.896,33.884) 32.162,33.729 32.476,32.253 cw(c32.281,32.211) 32.48,32.224 ; v2(32.25,30.625) v2@32.262,30.625 ; 32.481,32.223 32.532,31.28
GND: C1.2 C2.2 C3.2 C4.2 C5.2 C6.2 C7.2 C8.2 C9.2 IC1.4 IC2.A7 IC2.B1 IC2.G8 IC2.H2 J1.5 pad.4 R1.1 R6.1 R7.1 U1.1 U2.5 U2.10 U2.12 U2.13 U2.16 U3.2 U3.3 U3.6 U3.7 U4.2 U4.3 Y1.2 | length 32.9
  Top Layer w0.15: U2.13 U2.12 24.8,35.375 24.875,35.375 ccw(c24.875,35.6) 24.907,35.377 25.361,35.442 ccw(c25.34,35.591) 25.446,35.484 25.552,35.591 ; U2.10 24.75,36.175 24.968,36.175 25.552,35.591 ; C5.2@26.293,33.412 26.299,33.462 26.325,33.66 v1(26.325,34.082) ; v1@26.325,34.075 v1(26.325,34.082) 26.335,34.4 U2.16 26.275,34.65 26.275,34.868 26.027,35.117 26.02,35.117 25.552,35.584 25.552,35.591 ; U2.5 27.25,36.675 27.325,36.675 cw(c27.325,36.45) 27.452,36.636 27.564,36.559 cw(c27.354,36.249) 27.6,36.532 27.719,36.429 cw(c27.624,36.313) 27.729,36.42 ; v1(28.308,35.253) 28.308,35.718 28.226,35.8 C4.2 28.017,36.17 27.979,36.17 27.73,36.419 ; 27.729,36.42 27.73,36.419
  Top Layer w0.2: 30.325,35.625 30.713,35.732 cw(c30.766,35.539) 30.766,35.739 30.788,35.739 30.94,35.731 30.942,35.698 30.947,35.625 30.97,35.275 U3.7 ; U3.6 31.163,35.718 31.418,35.718 ccw(c31.418,35.918) 31.559,35.777 31.638,35.855 ; 31.631,35.902 cw(c31.438,35.85) 31.638,35.855 ; 31.63,35.902 31.569,36.125 31.569,36.675 U3.3 ; 31.841,36.058 32.137,36.355 U3.2 ; 31.867,36.02 31.664,35.877 ccw(c31.779,35.714) 31.639,35.856 31.638,35.855
  Top Layer w0.25: v1(24.55,29.15) 24.564,29.15 24.664,29.25 C1.2 ; C3.2 29.49,31.625 30.086,32.221 30.246,32.221 IC2.G8 ; C6.2 29.727,35.552 cw(c29.904,35.375) 29.904,35.625 30.325,35.625 v1(30.3,35.425) ; J1.5 30.475,27.275 30.475,28.775 C7.2 30.5,29.515 30.646,29.661 30.646,29.821 IC2.A7 ; IC2.H2 32.65,32.826 cw(c33.253,32.825) 32.825,33.25 32.952,33.377 ccw(c32.775,33.554) 33.012,33.475 C9.2 32.978,33.725 v1(32.896,33.884) ; IC2.B1 33.106,30.217 cw(c33.05,29.825) 33.321,30.114 v1(33.599,29.853) ; C8.2 33.8,28.015 v1(33.8,27.55)
  Top Layer w0.5: v1(24.55,29.15) 24.779,29.379 ccw(c24.425,29.732) 24.925,29.732 R7.1 ; C2.2 27.582,31.693 27.582,31.098 U1.1@27.605,31.075
  Bottom Layer w0.15: v1(26.325,34.082) 26.72,34.235 U4.3
  Bottom Layer w0.25: R6.1 27.731,28.525 ccw(c27.73,28.775) 27.786,28.531 27.983,28.576 cw(c28.038,28.332) 28.021,28.581 ; 27.248,28.644 ccw(c27.035,28.775) 27.285,28.775 27.285,29.439 R1.1 ; v1(27.25,31.925) 28.022,31.925 v1(28.597,31.35) ; U4.2 27.83,35.535 v1(28.308,35.253) ; 28.021,28.581 29.05,28.65 IC1.4@29.112,28.838 ; v3(29.075,28.225) 29.112,28.263 IC1.4@29.112,28.838 ; IC1.4 29.112,28.912 IC1.4@29.112,28.838
  Bottom Layer w0.5: J1.5 30.456,27.25 31.4,26.306 pad.4
  other v1: 30.178,33.425 33.775,35.4 26.35,36.225
GPIO_OUT: IC2.C8 pad.5 | length 1.7
  Top Layer w0.2: pad.5 29.842,30.617 30.242,30.617 IC2.C8
H3L_NCS: IC2.H6 R4.2 U2.8 | length 10
  Top Layer w0.15: U2.8 25.475,37.15 25.475,37.226 cw(c25.7,37.225) 25.7,37.45 26.163,37.45 26.55,37.45 cw(c26.55,37.225) 26.691,37.4 26.708,37.387 ccw(c26.802,37.503) 26.803,37.353 27.686,37.36 cw(c27.689,36.985) 27.692,37.36 28.61,37.353 cw(c28.61,37.203) 28.76,37.203 28.76,34.25 R4.2@28.78,34.107
  Top Layer w0.2: R4.2@28.78,34.107 cw(c28.718,34.297) R4.2 28.78,34.1 29.917,34.1 cw(c29.917,33.9) 30.058,34.042 30.059,34.041 ccw(c30.2,34.183) 30.073,34.028 30.432,33.734 cw(c30.178,33.425) 30.478,33.689 30.975,33.126 ; 30.975,33.126 ccw(c31.125,33.258) 30.984,33.116 cw(c30.842,32.975) 31.042,32.98 IC2.H6
LSM_NCS: IC2.B6 R2.2 U3.12 | length 12.4
  Top Layer w0.15: v1(33.3,35.1) 33.449,34.804 ccw(c33.583,34.872) 33.536,34.729 33.55,34.725 R2.2@33.742,34.661
  Top Layer w0.2: U3.12 32.988,35.125 v1(33.3,35.1)
  Bottom Layer w0.15: v2(31.05,30.225) 31.05,28.654 31.24,28.464 31.24,28.432 31.372,28.3 33.278,28.3 33.478,28.5 33.64,28.5 33.84,28.7 ccw(c33.734,28.806) 33.884,28.807 ; v1(33.3,35.1) 33.967,32.532 ; 33.884,28.807 33.881,29.556 cw(c34.031,29.555) 33.907,29.64 ccw(c33.599,29.853) 33.905,30.069 cw(c34.029,30.154) 33.879,30.153 33.876,30.719 cw(c34.026,30.719) 33.889,30.78 ; 33.889,30.781 ccw(c32.466,31.426) 34.029,31.432 ccw(c33.654,31.431) 33.991,31.595 cw(c34.126,31.66) 33.976,31.659 33.972,32.495 ccw(c33.822,32.494) 33.968,32.532
MS5_MISO: IC2.B4 U4.6 | length 10.2
  Bottom Layer w0.2: U4.6 25.455,34.307 25.493,34.299 cw(c25.451,34.103) 25.502,34.296 cw(c25.365,33.784) 25.892,33.849 ccw(c26.09,33.875) 26.099,33.675 26.106,33.676 cw(c26.116,33.476) 26.109,33.676 ; 26.11,33.676 26.629,33.69 ccw(c26.624,33.889) 26.632,33.69 cw(c26.645,33.44) 26.644,33.69 ccw(c26.643,33.89) 26.647,33.69 ; 26.648,33.69 28.584,33.741 ; 28.585,33.741 cw(c28.59,33.541) 28.589,33.741 29.096,33.741 cw(c29.096,33.541) 29.106,33.741 29.42,33.725 29.421,33.724 cw(c29.409,33.525) 29.461,33.718 29.486,33.711 cw(c29.381,33.325) 29.694,33.076 29.655,33.026 cw(c29.498,33.151) 29.597,32.977 29.446,32.891 ccw(c29.545,32.717) 29.403,32.577 30.263,31.717 cw(c30.121,31.576) 30.313,31.521 30.313,31.519 ccw(c30.65,31.425) 30.3,31.425 30.3,31.025 ccw(c30.65,31.025) 30.65,30.675 30.971,30.675 cw(c30.97,30.475) 31.102,30.625 31.104,30.623 ccw(c31.413,30.974) 31.329,30.514 cw(c31.292,30.318) 31.381,30.497 31.384,30.495 cw(c31.296,30.316) 31.417,30.475 ccw(c31.85,31.025) 31.511,30.413 v2(31.85,30.225) cw(c31.752,30.05) v2(31.85,30.225)
MS5_MOSI: IC2.C4 U4.7 | length 9.8
  Bottom Layer w0.2: U4.7 26.026,35.675 26.761,34.94 27.976,34.94 cw(c27.976,34.74) 28.074,34.914 29.384,34.174 ccw(c29.581,34.523) 29.412,34.16 ccw(c29.497,34.341) 29.423,34.155 30.326,33.797 cw(c30.178,33.425) 30.45,33.718 30.558,33.618 cw(c30.422,33.471) 30.564,33.612 31.342,32.825 cw(c31.2,32.685) 31.4,32.685 31.4,31.096 ccw(c31.6,31.096) 31.444,30.97 31.578,30.805 ccw(c31.85,31.025) 31.681,30.719 v2(31.85,30.625)
MS5_NCS: IC2.G6 R3.2 U4.4 U4.5 | length 7.3
  Top Layer w0.2: R3.2 28.9,33.325 v1(29.381,33.325)
  SIG w0.2: v1(29.381,33.325) 29.776,32.949 cw(c29.638,32.804) 29.779,32.946 ; 29.78,32.945 30.442,32.283 ccw(c30.583,32.425) 30.583,32.225 v2(31.05,32.225)
  Bottom Layer w0.2: U4.5 U4.4 27.855,33.325 v1(29.381,33.325)
MS5_SCLK: IC2.A5 U4.8 | length 10.3
  SIG w0.2: v1(25.4,36.275) 25.4,35.863 ccw(c25.6,35.863) 25.458,35.722 30.403,30.778 ccw(c30.65,31.025) 30.672,30.676 30.892,30.689 cw(c30.905,30.49) 31.006,30.662 ; 31.007,30.661 31.259,30.511 cw(c31.079,30.21) 31.429,30.229 v2(31.45,29.825)
  Bottom Layer w0.2: U4.8 25.235,36.925 25.4,36.76 v1(25.4,36.275)
NetC9_1: C9.1 IC2.H3 | length 1
  Top Layer w0.2: IC2.H3 32.25,32.749 cw(c32.45,32.749) 32.25,32.753 32.263,33.45 C9.1@32.3,33.6
NetD1_1: D1.1 R1.2 | length 1.1
  Bottom Layer w0.25: D1.1 25.725,29.675 26.746,29.675 R1.2@26.771,29.65
NetD1_2: D1.2 IC2.B8 | length 5.8
  Bottom Layer w0.25: D1.2 25.025,29.825 25.101,30.076 cw(c25.34,30.003) 25.191,30.204 25.255,30.251 cw(c25.404,30.05) 25.404,30.3 30.071,30.3 cw(c30.071,30.05) 30.237,30.236 v4(30.25,30.225)
NetD2_1: D2.1 R7.2 | length 1
  Top Layer w0.15: R7.2@24.95,30.954 D2.1@24.95,31.925
NetIC2_D8: IC2.D8 Y1.3 | length 3.1
  Top Layer w0.25: v1(28.55,30.775) 29.282,30.775 29.532,31.025 IC2.D8
  Bottom Layer w0.25: Y1.3 27.525,30.775 v1(28.55,30.775)
SWCLK: IC2.B2
  other v2: 32.65,30.225
SWDIO: IC2.C2 IC2.D1 IC2.D2 | length 1.5
  Top Layer w0.15: IC2.C2 IC2.D2 32.796,31.029 cw(c32.8,30.879) 32.802,31.029 IC2.D1 33.083,31.042 ccw(c33.016,31.176) 33.092,31.047 33.228,31.129 ccw(c33.05,31.425) 33.248,31.141 v1(33.654,31.424)
USB_N: IC2.D3 J1.2 | length 9.9
  SIG w0.15: J1.2 29.455,25.676 ccw(c29.8,26.25) 30.138,25.672 31.552,26.498 ccw(c31.275,26.973) 31.796,26.799 ccw(c30.45,27.25) 31.839,26.957 31.877,27.137 31.875,27.143 cw(c32.017,27.192) 31.867,27.192 31.879,28.95 cw(c32.029,28.949) 31.96,29.082 cw(c32.029,28.949) 32.092,29.085 ccw(c32.25,29.425) 32.618,29.351 cw(c32.765,29.321) 32.697,29.455 ccw(c32.471,29.901) 32.764,29.496 33.035,29.692 ccw(c32.65,30.225) 33.228,29.911 cw(c33.601,29.868) 33.292,30.081 ccw(c32.65,30.225) 33.294,30.092 33.372,30.47 ccw(c32.883,30.572) 33.361,30.718 ; v2(32.25,31.025) 33.08,30.949 cw(c33.05,30.625) 33.361,30.72
USB_P: IC2.C1 J1.3 | length 8
  SIG w0.15: J1.3 30.105,27.824 cw(c30.45,27.25) 31.085,27.036 ccw(c31.275,26.973) 31.171,26.802 ; 31.172,26.801 ccw(c31.275,26.973) 31.464,26.91 ccw(c30.45,27.25) 31.517,27.166 31.517,27.195 31.529,28.952 cw(c32.029,28.949) 31.801,29.394 ; 31.803,29.395 ccw(c31.735,29.529) 31.882,29.499 cw(c32.25,29.425) 32.408,29.765 ccw(c32.471,29.901) 32.539,29.767 ccw(c32.471,29.901) 32.559,29.78 32.746,29.914 ccw(c32.65,30.225) 32.973,30.265 33.03,30.543 ccw(c32.883,30.572) v2@33.026,30.616 ; v2@33.026,30.617 v2(33.05,30.625)
pads on no net: IC2.A4 IC2.A6 IC2.B5 IC2.C5 IC2.C6 IC2.C7 IC2.D5 IC2.E2 IC2.E3 IC2.E4 IC2.E5 IC2.E6 IC2.E8 IC2.F1 IC2.F2 IC2.F3 IC2.F4 IC2.F5 IC2.F6 IC2.F8 IC2.G1 IC2.G2 IC2.G3 IC2.G4 IC2.G5 IC2.G7 IC2.H4 IC2.H5 IC2.H8 J1.4 J1.Shell U2.2 U2.3 U2.9 U2.11 U3.4 U3.9 U3.10 U3.11

## Polygon pours and split planes (outlines as drawn)
3v3 on VCC "3V3_L04_P000" (solid, pour order 0): 24.129,25.379 24.129,37.65 cw(c24.368,37.635) 24.383,37.875 33.9,37.875 cw(c33.9,37.65) 34.125,37.65 34.129,25.379 cw(c33.875,25.379) 33.875,25.125 24.383,25.125 cw(c24.383,25.379)
GND on GND "GND_L02_P001" (solid, pour order 1): 24.129,25.379 24.129,37.65 cw(c24.368,37.635) 24.383,37.875 33.875,37.875 cw(c33.875,37.621) 34.129,37.621 34.129,25.379 cw(c33.875,25.379) 33.875,25.125 24.383,25.125 cw(c24.383,25.379)
GND on GND_2 "GND_L05_P002" (solid, pour order 2): 24.129,25.379 24.125,37.625 cw(c24.379,37.621) 24.383,37.875 33.875,37.875 cw(c33.864,37.611) 34.128,37.6 34.129,25.379 cw(c33.875,25.379) 33.875,25.125 24.383,25.125 cw(c24.383,25.379)
GND on SIG "GND_L03_P003" (solid, pour order 3): 24.129,25.379 24.129,37.65 cw(c24.368,37.635) 24.383,37.875 33.875,37.875 cw(c33.875,37.621) 34.129,37.621 34.129,25.379 cw(c33.875,25.379) 33.875,25.125 24.383,25.125 cw(c24.383,25.379)

## Silkscreen, mask and mechanical layers (free items; w line width, h text height)
Bottom Overlay:
  text "-" at 31.229,27.204 h1
  text "+" at 26.429,27.162 h1
Mechanical 1:
  lines w0.254: 24.129,25.379 ccw(c24.383,25.379) 24.383,25.125 33.946,25.125 ccw(c33.946,25.379) 34.2,25.379 34.2,37.621 ccw(c33.946,37.621) 33.946,37.875 24.383,37.875 ccw(c24.383,37.621) 24.129,37.621 24.129,25.379